# Altium PCB Test.PcbDoc (part 1 of 4)
Units mm, origin at the board's own origin, x right, y up, seen from the top; angles counter-clockwise.
Board outline 152.4 x 101.6 mm, 4 copper layers (Top Layer 1, Top Layer, Bottom Layer, Bottom Layer 1), stack 0.603 mm thick; 308 components, 154 nets, 859 pads, 6474 vias.
Unrouted connection lines stored in the file: 683.
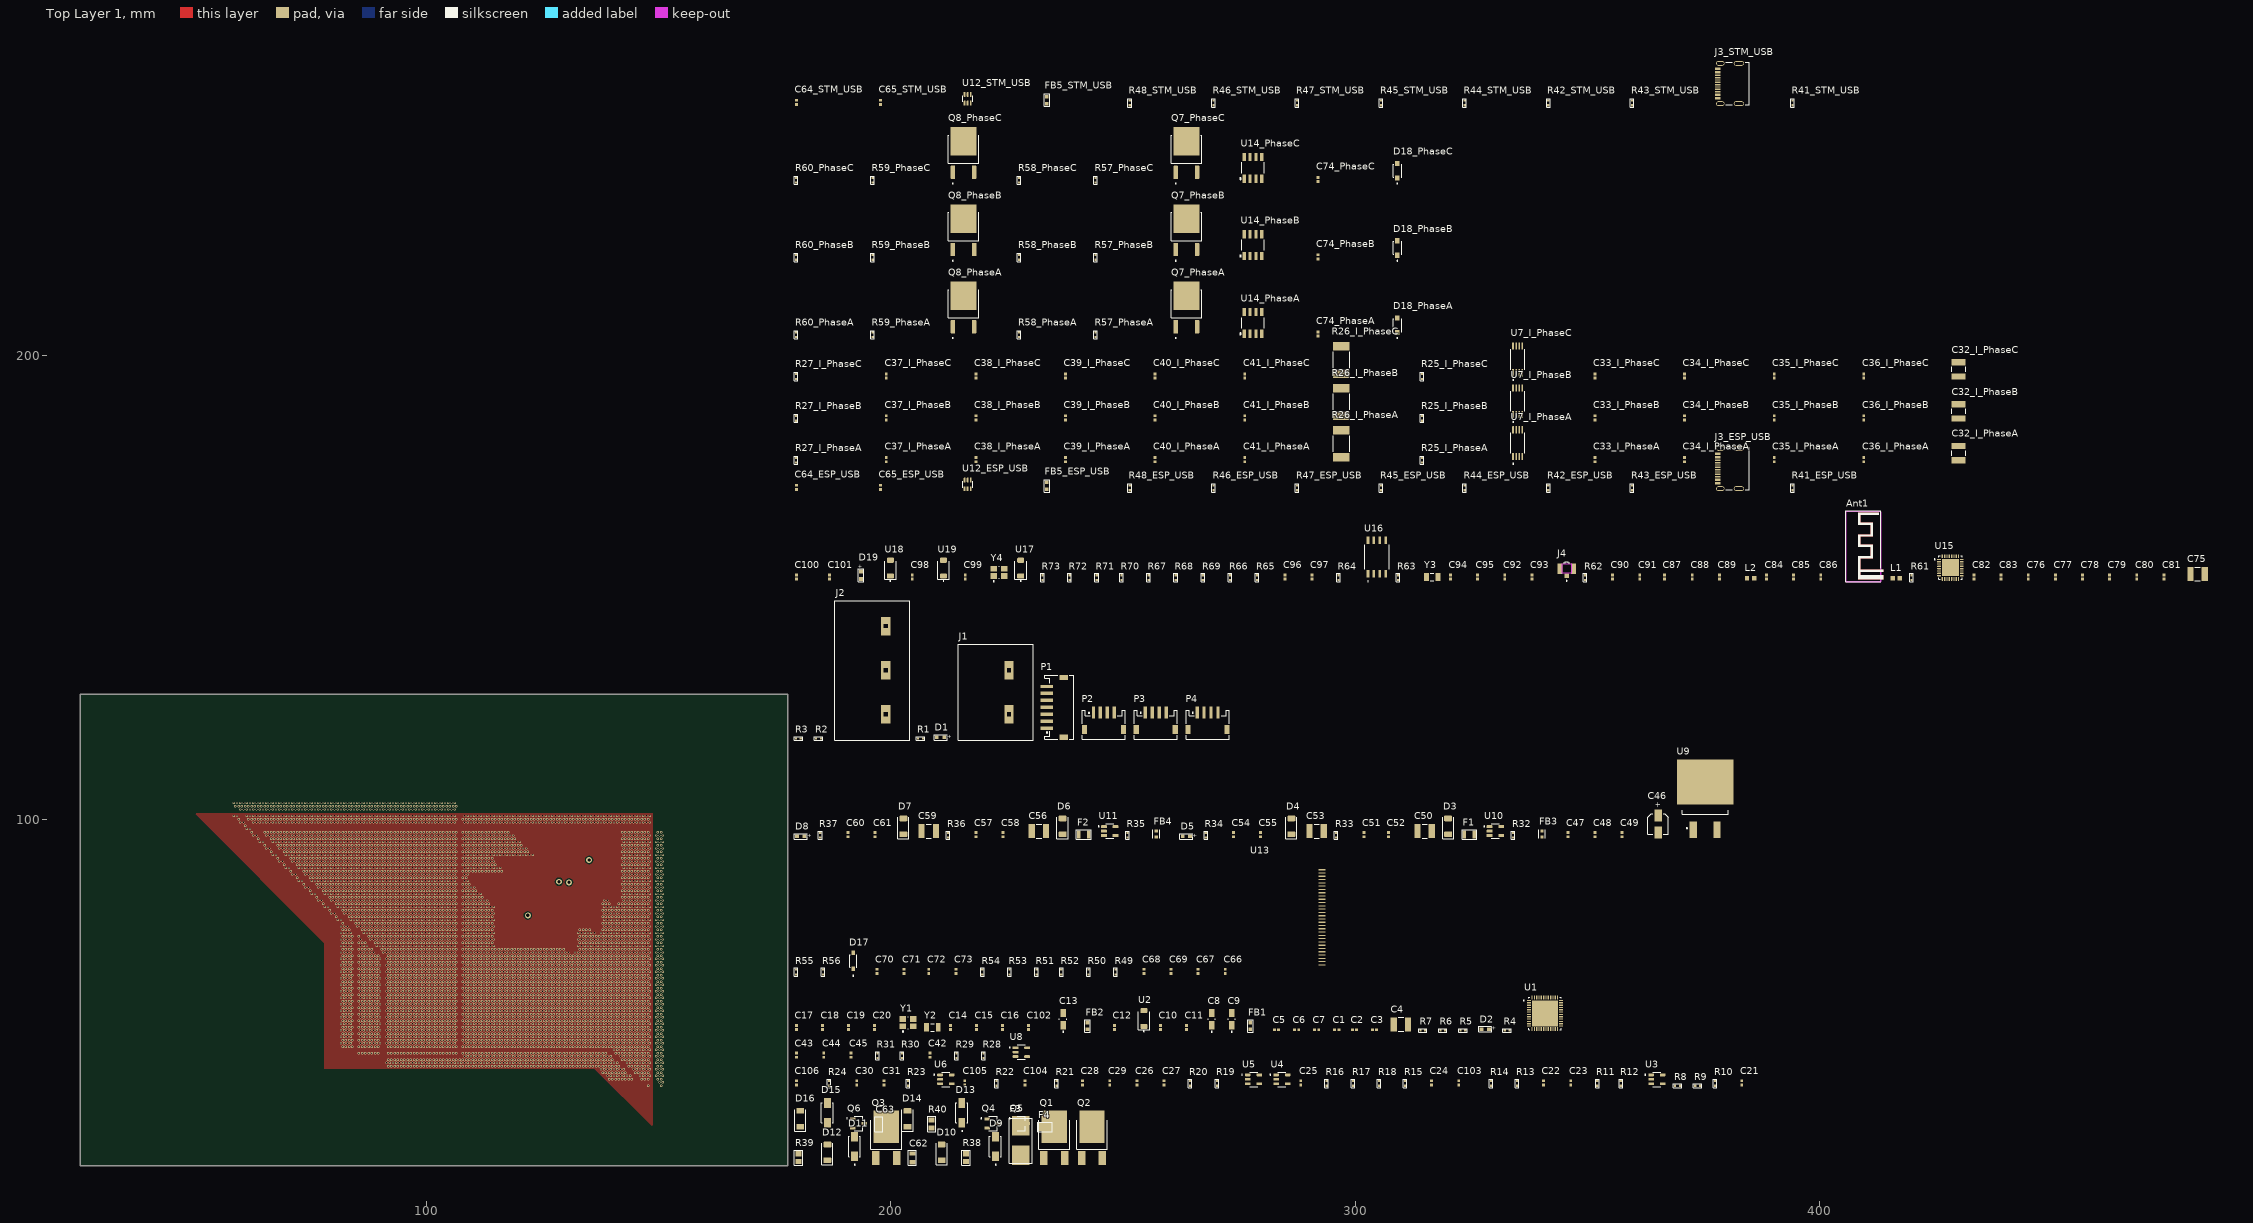
[diagram p0: Top Layer 1 view]
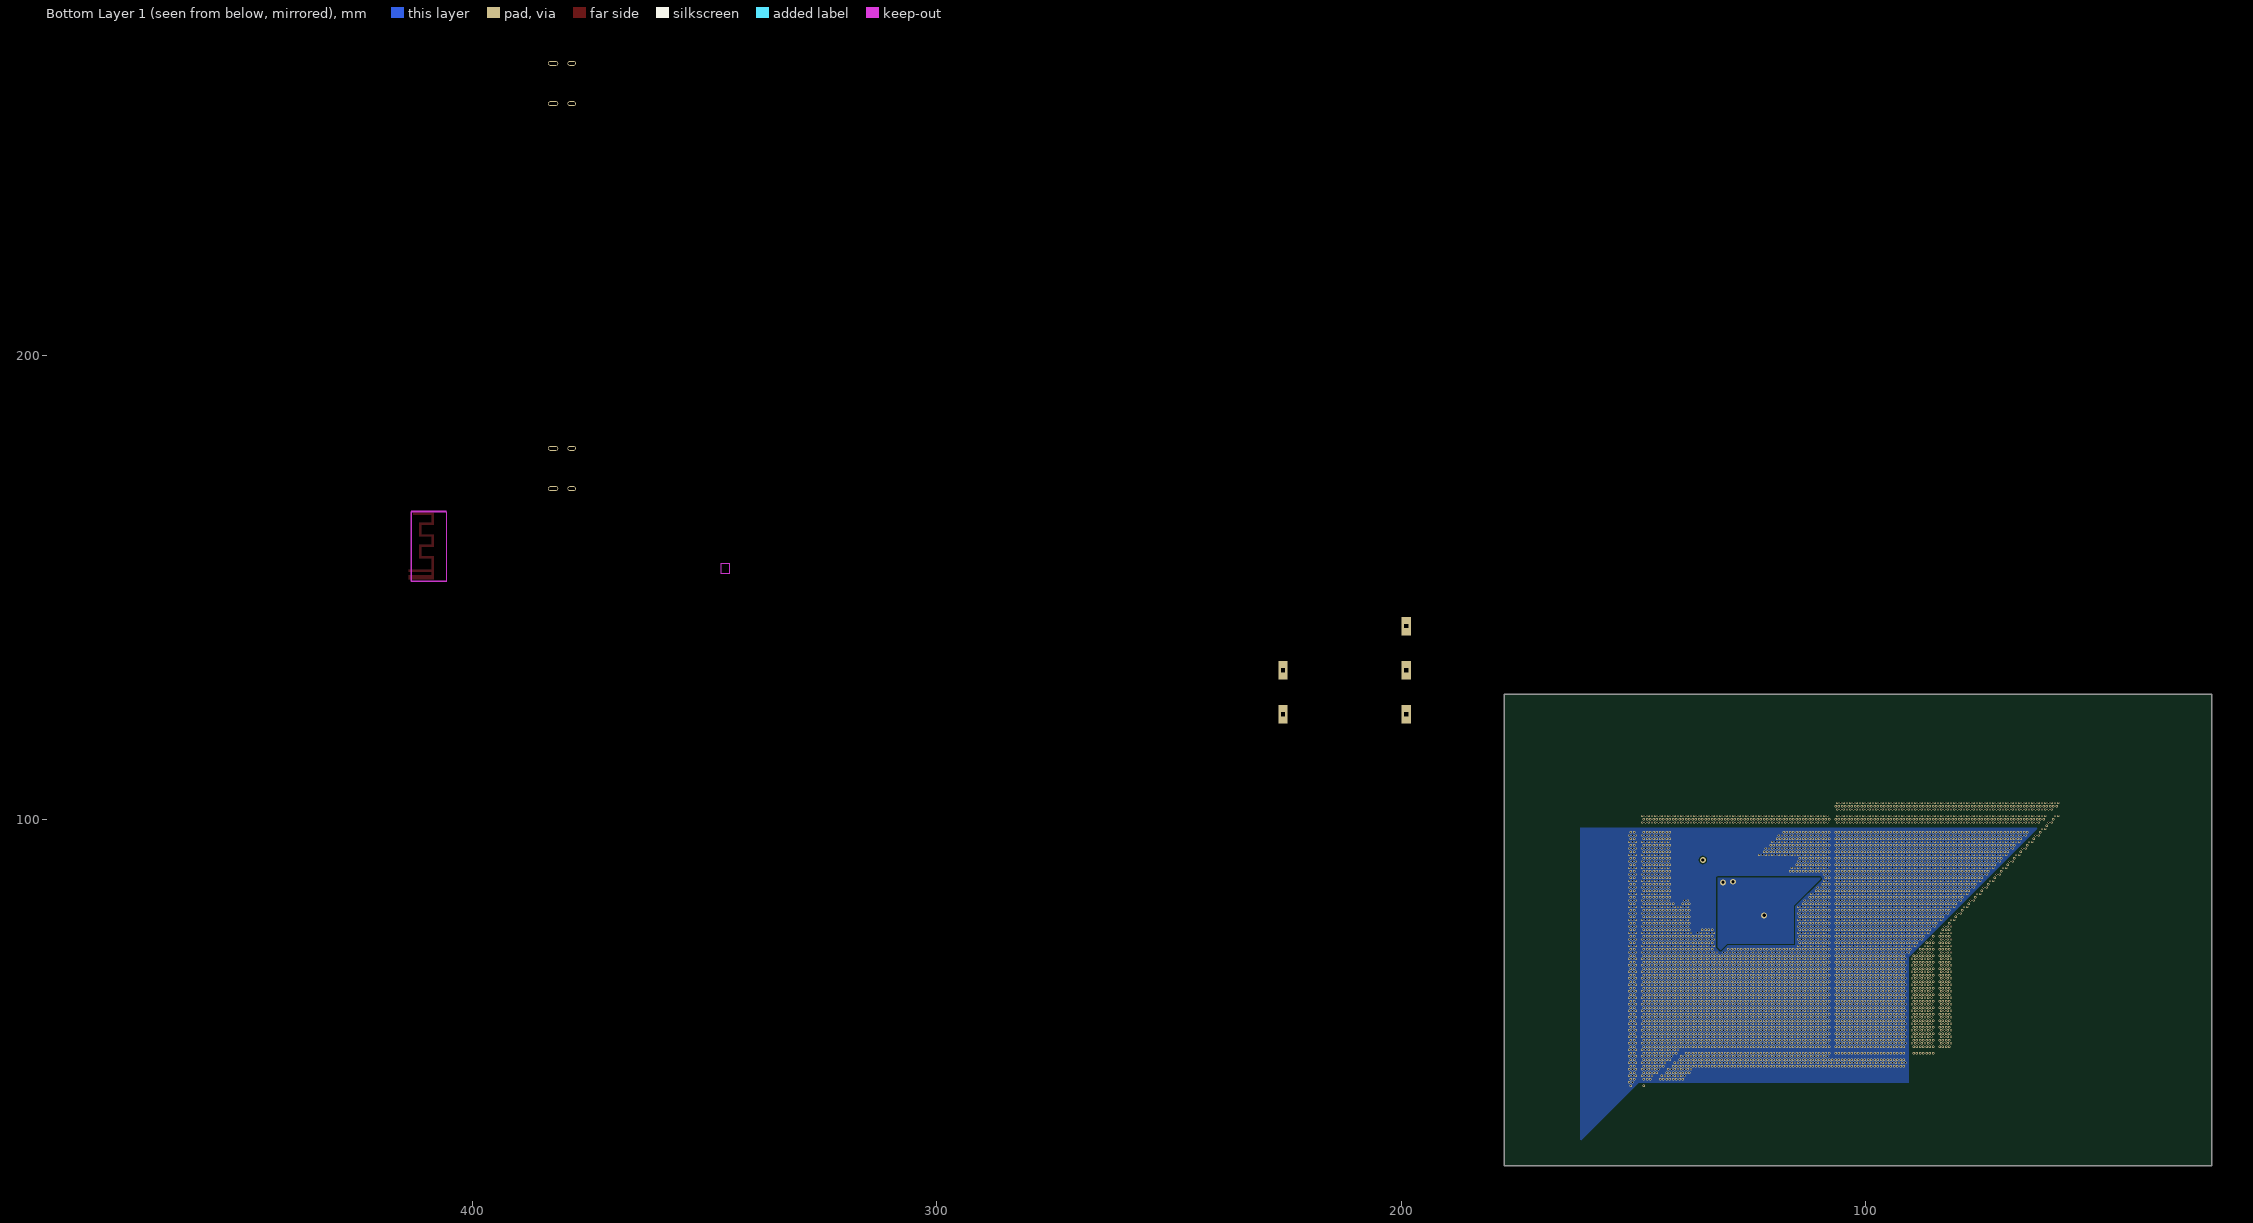
[diagram p1: Bottom Layer 1 view, seen from below]
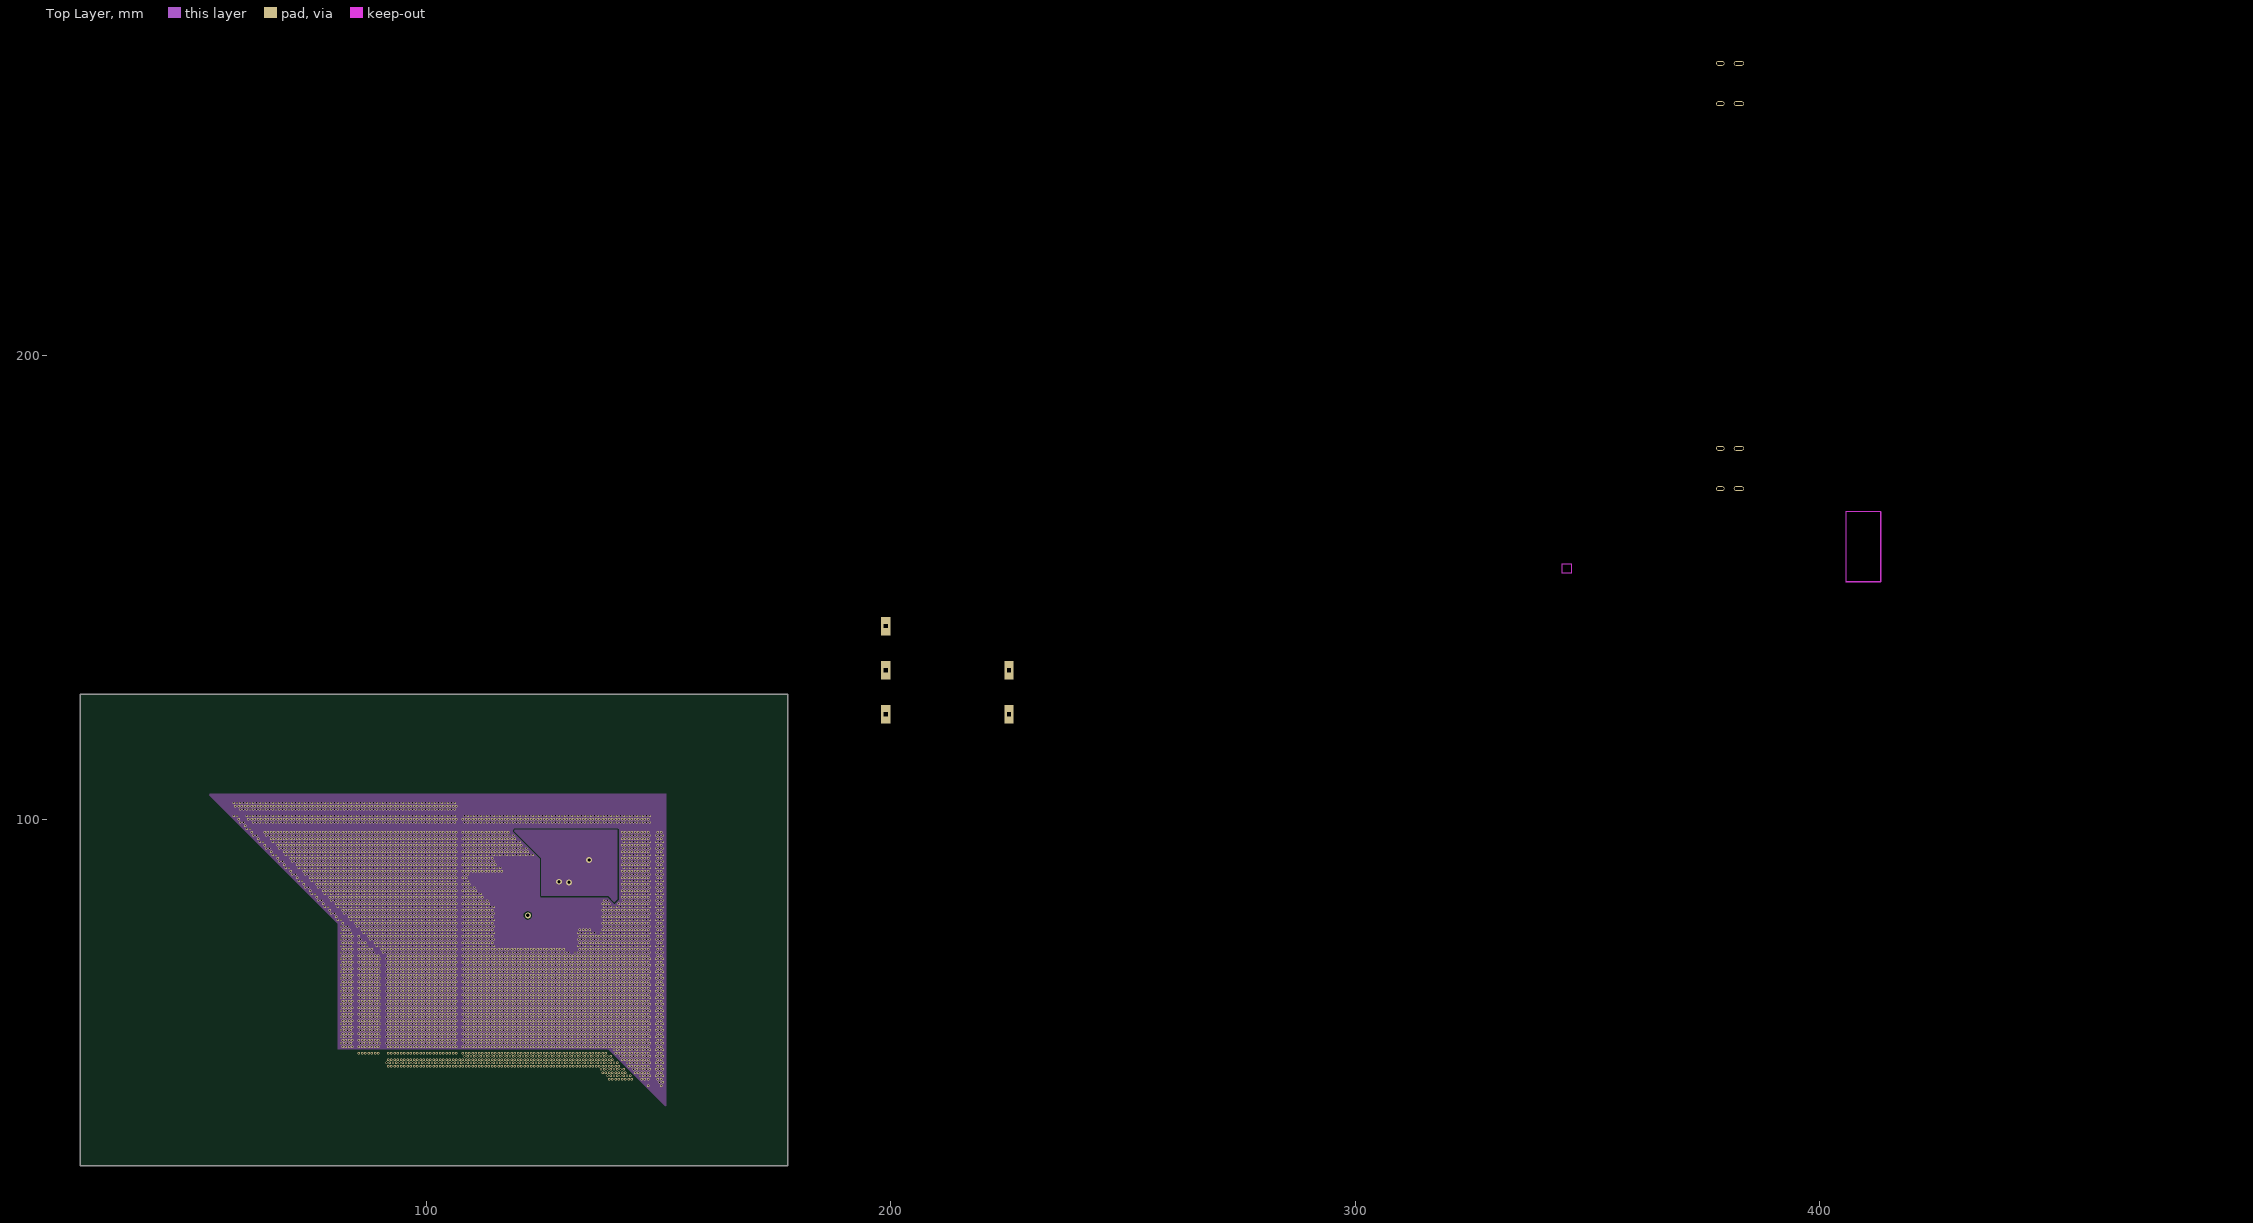
[diagram p2: Top Layer]
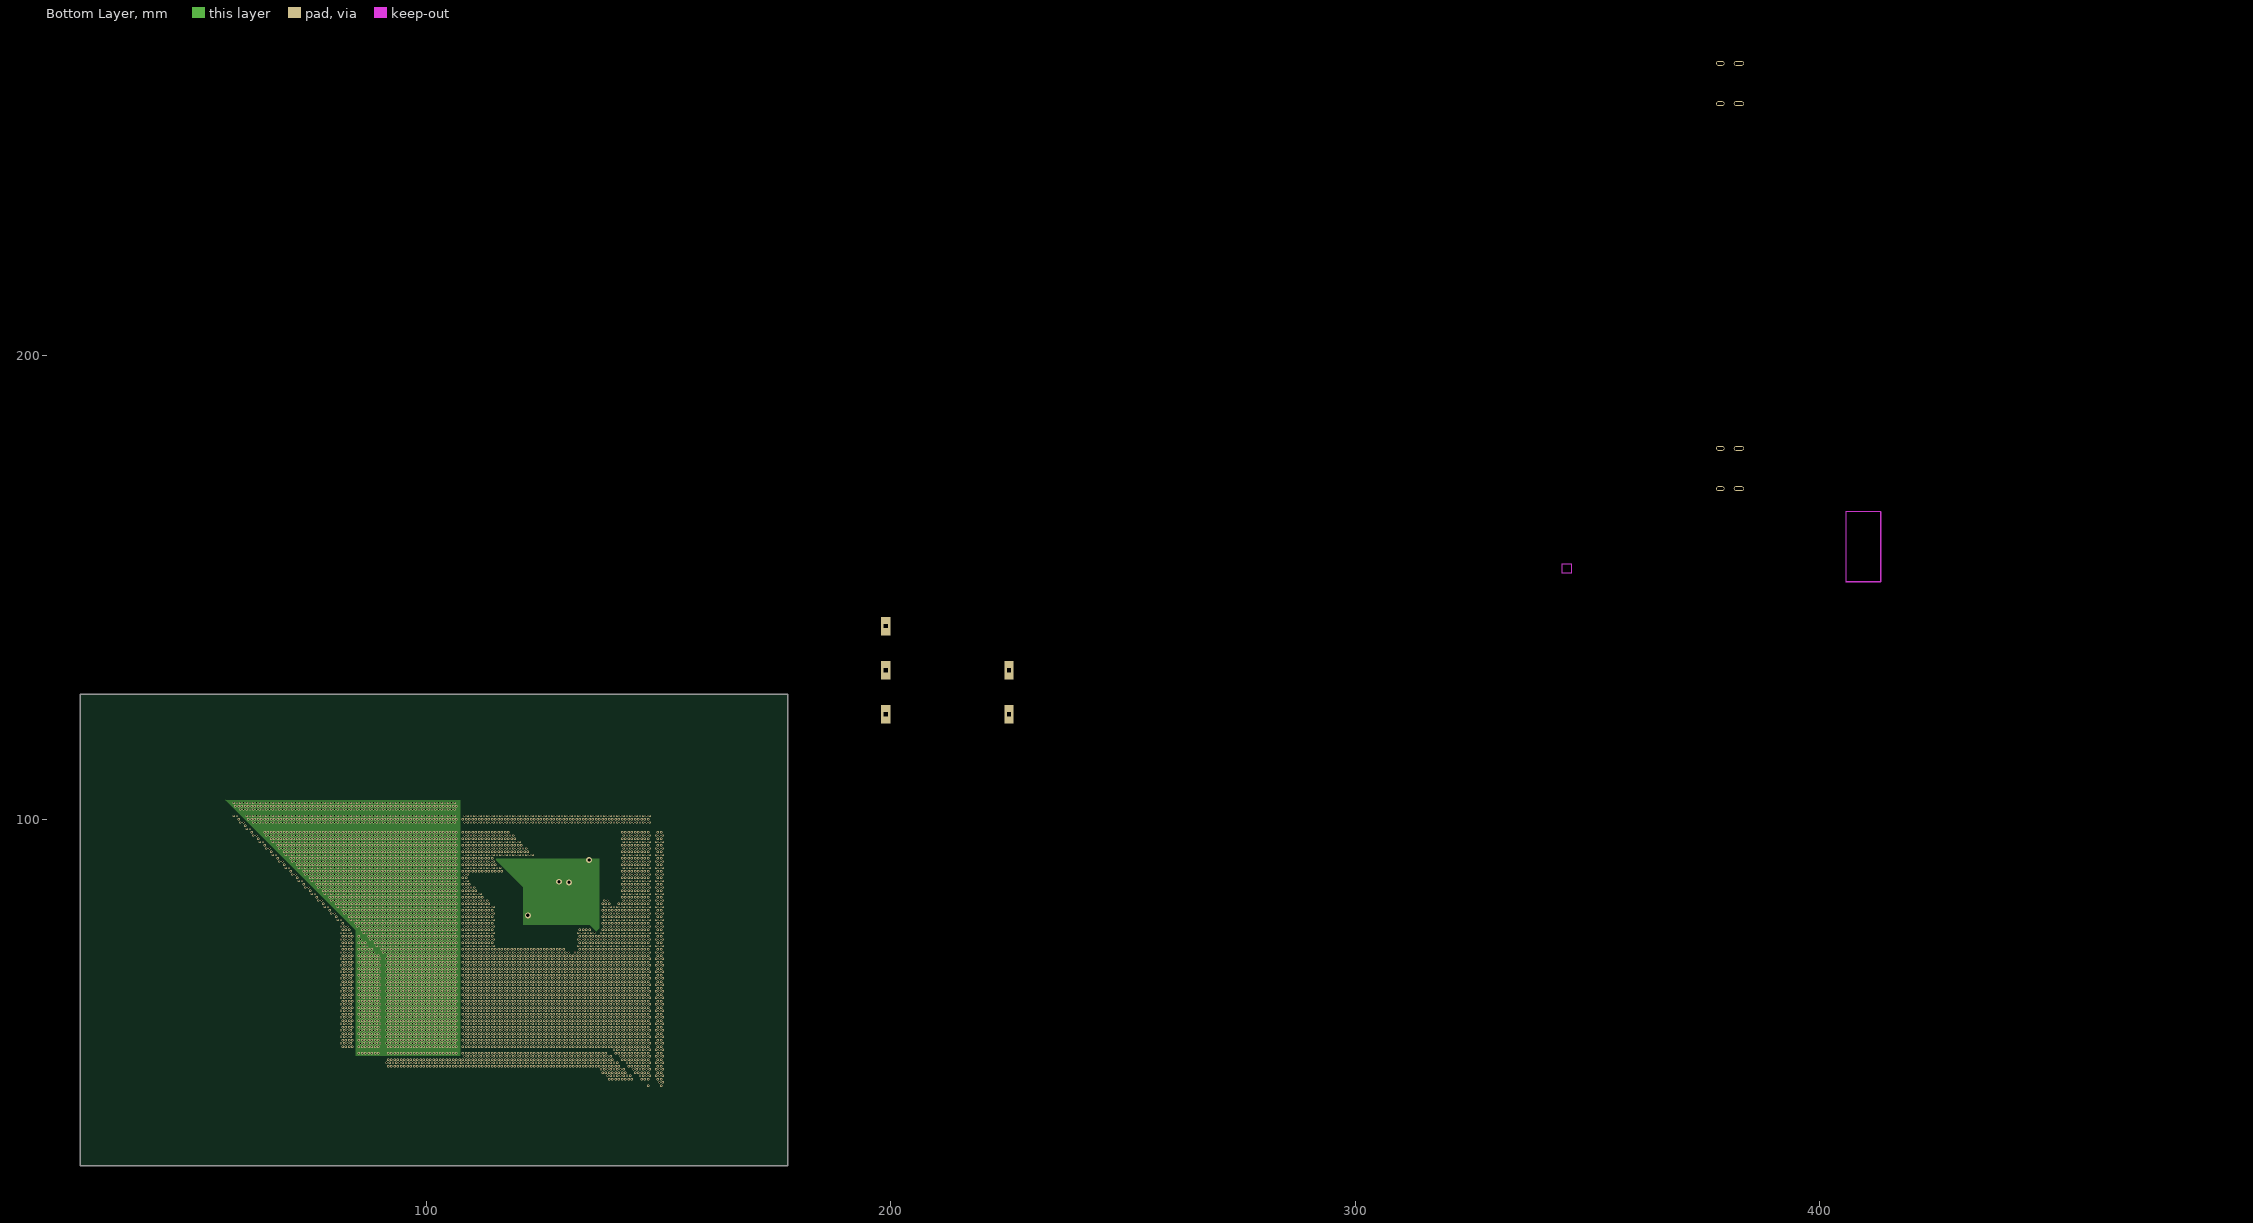
[diagram p3: Bottom Layer]

## Layer stack, top to bottom
Top Solder: solder mask 0.0102, Solder Resist, Dk 3.5
Top Layer 1: signal copper 0.035
Dielectric 2: prepreg 0.0711, PP-006, Dk 4.1
Top Layer: signal copper 0.0356
Dielectric 1: dielectric 0.32, FR-4, Dk 4.8
Bottom Layer: signal copper 0.0356
Dielectric 3: prepreg 0.0711, PP-006, Dk 4.1
Bottom Layer 1: signal copper 0.035
Bottom Solder: solder mask 0.0102, Solder Resist, Dk 3.5

## Board outline
25.4,25.4 177.8,25.4 177.8,127 25.4,127

## Design rules (kind name [scope] priority, off if disabled: settings)
Clearance [All] p1: gap=0.254 ignorepadtopadclearanceinfootprint=FALSE
DiffPairsRouting [All] p1: maxlimit=0.254 minlimit=0.254 mostfreqgap=0.254 toplayer_minwidth=0.381 toplayer_maxwidth=0.381 toplayer_prefwidth=0.381 midlayer1_minwidth=0.381 midlayer1_maxwidth=0.381 midlayer1_prefwidth=0.381 midlayer2_minwidth=0.381 midlayer2_maxwidth=0.381 midlayer2_prefwidth=0.381 bottomlayer_minwidth=0.381 bottomlayer_maxwidth=0.381 bottomlayer_prefwidth=0.381 maxuncoupledlength=12.7
MatchedLengths "Schematic Matched Net Lengths_1" [InDifferentialPairClass('USB_Out')] p1: tolerance=25.4 checknetsindiffpair=FALSE checkdiffpairvsdiffpair=TRUE checkxsignals=TRUE checkothers=TRUE usedelayunits=TRUE delaytolerance=5.000000
MatchedLengths "Schematic Matched Net Lengths" [InDifferentialPairClass('USB_In')] p2: tolerance=25.4 checknetsindiffpair=FALSE checkdiffpairvsdiffpair=TRUE checkxsignals=TRUE checkothers=TRUE usedelayunits=TRUE delaytolerance=5.000000
PolygonConnect [All] p1: connectstyle=Direct reliefconductorwidth=0.254 reliefentries=4 polygonreliefangle="90 Angle" airgapwidth=0.254
RoutingVias [All] p1: holewidth=0.711 width=1.27 viastyle="Through Hole" minholewidth=0.711 minwidth=1.27 maxholewidth=0.711 maxwidth=1.27
SolderMaskExpansion [All] p1: expansion=0.102 istentingtop=FALSE
SupplyNets "Schematic Supply Nets_9" [InNet('5Vout')] p1: voltage=0.000
SupplyNets "Schematic Supply Nets_8" [InNet('GND')] p2: voltage=0.000
SupplyNets "Schematic Supply Nets_7" [InNet('USB5V')] p3: voltage=0.000
SupplyNets "Schematic Supply Nets_6" [InNet('3V3_1')] p4: voltage=0.000
SupplyNets "Schematic Supply Nets_5" [InNet('Wifi_SPI_3V3')] p5: voltage=0.000
SupplyNets "Schematic Supply Nets_4" [InNet('MCU3V3')] p6: voltage=0.000
SupplyNets "Schematic Supply Nets_3" [InNet('3V3_2')] p7: voltage=0.000
SupplyNets "Schematic Supply Nets_2" [InNet('BatVoltage')] p8: voltage=0.000
SupplyNets "Schematic Supply Nets_1" [InNet('5Vin')] p9: voltage=0.000
SupplyNets "Schematic Supply Nets" [InNet('VHin')] p10: voltage=0.000
Width "Schematic Width Constraint_2" [InNet('NetD10_K')] p1: maxlimit=2.54 minlimit=1.27 preferedwidth=1.27
Width "Schematic Width Constraint_1" [InNet('NetD14_K')] p2: maxlimit=2.54 minlimit=1.27 preferedwidth=1.27
Width "Schematic Width Constraint" [InNetClass('Motor Power')] p3: maxlimit=2.54 minlimit=0.762 preferedwidth=0.762
Width [All] p4: maxlimit=0.254 minlimit=0.254 preferedwidth=0.254
29 further rules are at their usual default settings.

## Classes and differential pairs
differential pair class USB_Out: DR_ESP_USB DR_STM_USB
differential pair class USB_In: D_ESP_USB D_STM_USB
channel class USB: ESP_USB STM_USB
channel class GateDriver: PhaseA PhaseB PhaseC
channel class CurrentSense: I_PhaseA I_PhaseB I_PhaseC
net class "Motor Power": BatVoltage NetQ8_PhaseA_3 NetQ8_PhaseB_3 NetQ8_PhaseC_3 PhaseA PhaseB PhaseC
component class U_Wifi: Ant1 C75 C76 C77 C78 C79 C80 C81 C82 C83 C84 C85 C86 C87 C88 C89 C90 C91 C92 C93 C94 C95 C96 C97 C98 C99 C100 C101 D19 J4 L1 L2 R61 R62 R63 R64 R65 R66 R67 R68 R69 R70 R71 R72 R73 U15 U16 U17 U18 U19 Y3 Y4
component class U_TopLevelDesign: D1 J1 J2 P1 P2 P3 P4 R1 R2 R3
component class U_Power: C46 C47 C48 C49 C50 C51 C52 C53 C54 C55 C56 C57 C58 C59 C60 C61 D3 D4 D5 D6 D7 D8 F1 F2 FB3 FB4 R32 R33 R34 R35 R36 R37 U9 U10 U11
component class U_OLED: C66 C67 C68 C69 C70 C71 C72 C73 D17 R49 R50 R51 R52 R53 R54 R55 R56 U13
component class U_MCU: C1 C2 C3 C4 C5 C6 C7 C8 C9 C10 C11 C12 C13 C14 C15 C16 C17 C18 C19 C20 C102 D2 FB1 FB2 R4 R5 R6 R7 U1 U2 Y1 Y2
component class U_BattVoltSense: C42 C43 C44 C45 R28 R29 R30 R31 U8
component class U_BackEMF: C21 C22 C23 C24 C25 C26 C27 C28 C29 C30 C31 C103 C104 C105 C106 R8 R9 R10 R11 R12 R13 R14 R15 R16 R17 R18 R19 R20 R21 R22 R23 R24 U3 U4 U5 U6
component class U_5VProtect: C63 D13 D14 D15 D16 F4 Q4 Q5 Q6 R40
component class STM_USB: C64_STM_USB C65_STM_USB FB5_STM_USB J3_STM_USB R41_STM_USB R42_STM_USB R43_STM_USB R44_STM_USB R45_STM_USB R46_STM_USB R47_STM_USB R48_STM_USB U12_STM_USB
component class PhaseC: C74_PhaseC D18_PhaseC Q7_PhaseC Q8_PhaseC R57_PhaseC R58_PhaseC R59_PhaseC R60_PhaseC U14_PhaseC
component class PhaseB: C74_PhaseB D18_PhaseB Q7_PhaseB Q8_PhaseB R57_PhaseB R58_PhaseB R59_PhaseB R60_PhaseB U14_PhaseB
component class PhaseA: C74_PhaseA D18_PhaseA Q7_PhaseA Q8_PhaseA R57_PhaseA R58_PhaseA R59_PhaseA R60_PhaseA U14_PhaseA
component class I_PhaseC: C32_I_PhaseC C33_I_PhaseC C34_I_PhaseC C35_I_PhaseC C36_I_PhaseC C37_I_PhaseC C38_I_PhaseC C39_I_PhaseC C40_I_PhaseC C41_I_PhaseC R25_I_PhaseC R26_I_PhaseC R27_I_PhaseC U7_I_PhaseC
component class I_PhaseB: C32_I_PhaseB C33_I_PhaseB C34_I_PhaseB C35_I_PhaseB C36_I_PhaseB C37_I_PhaseB C38_I_PhaseB C39_I_PhaseB C40_I_PhaseB C41_I_PhaseB R25_I_PhaseB R26_I_PhaseB R27_I_PhaseB U7_I_PhaseB
component class I_PhaseA: C32_I_PhaseA C33_I_PhaseA C34_I_PhaseA C35_I_PhaseA C36_I_PhaseA C37_I_PhaseA C38_I_PhaseA C39_I_PhaseA C40_I_PhaseA C41_I_PhaseA R25_I_PhaseA R26_I_PhaseA R27_I_PhaseA U7_I_PhaseA
component class HighPowerProtect: C62 D9 D10 D11 D12 F3 Q1 Q2 Q3 R38 R39
component class ESP_USB: C64_ESP_USB C65_ESP_USB FB5_ESP_USB J3_ESP_USB R41_ESP_USB R42_ESP_USB R43_ESP_USB R44_ESP_USB R45_ESP_USB R46_ESP_USB R47_ESP_USB R48_ESP_USB U12_ESP_USB
differential pair DR_STM_USB: +DR_STM_USB_P -DR_STM_USB_N
differential pair DR_ESP_USB: +DR_ESP_USB_P -DR_ESP_USB_N
differential pair D_STM_USB: +D_STM_USB_P -D_STM_USB_N
differential pair D_ESP_USB: +D_ESP_USB_P -D_ESP_USB_N

## Components (designator, comment, footprint, x,y, rotation, side; value= is the part's Value field where it differs from the comment)
Ant1 "IFA-2.4Ghz" 2.4Ghz-IFA 413.766,152.654 r90 top
C1 "0402-100nF" CAPC0402(1005)60_N 296.037,54.737 r0 top value=100nF
C2 "0402-100nF" CAPC0402(1005)60_N 299.847,54.737 r0 top value=100nF
C3 "0402-4.7uF" CAPC0402(1005)60_N 304.165,54.737 r0 top value=4.7µF
C4 "T1411-470uF" CAPPC3528X210N 309.88,55.88 r0 top value=470µF
C5 "0402-100nF" CAPC0402(1005)60_N 283.083,54.737 r0 top value=100nF
C6 "0402-100nF" CAPC0402(1005)60_N 287.401,54.737 r0 top value=100nF
C7 "0402-100nF" CAPC0402(1005)60_N 291.719,54.737 r0 top value=100nF
C8 "T1206-10uF" CAPMP3216X180N 269.113,57.023 r90 top value=10µF
C9 "T1206-10uF" CAPMP3216X180N 273.431,57.023 r90 top value=10µF
C10 "0402-100nF" CAPC0402(1005)60_N 258.064,55.245 r90 top value=100nF
C11 "0402-100nF" CAPC0402(1005)60_N 263.652,55.245 r90 top value=100nF
C12 "0402-100nF" CAPC0402(1005)60_N 248.158,55.245 r90 top value=100nF
C13 "T1206-10uF" CAPMP3216X180N 237.109,57.023 r90 top value=10µF
C14 "0402-100nF" CAPC0402(1005)60_N 212.852,55.245 r90 top value=100nF
C15 "0402-100nF" CAPC0402(1005)60_N 218.44,55.245 r90 top value=100nF
C16 "0402-100nF" CAPC0402(1005)60_N 224.028,55.245 r90 top value=100nF
C17 "0402-6pF" CAPC0402(1005)60_N 179.705,55.245 r90 top value=6pF
C18 "0402-6pF" CAPC0402(1005)60_N 185.293,55.245 r90 top value=6pF
C19 "0402-15pF" CAPC0402(1005)60_N 190.881,55.245 r90 top value=15pF
C20 "0402-15pF" CAPC0402(1005)60_N 196.469,55.245 r90 top value=15pF
C21 "0402-1nF" CAPC0402(1005)60_N 383.286,43.307 r90 top value=1nF
C22 "0402-10nF" CAPC0402(1005)60_N 340.614,43.307 r90 top value=10nF
C23 "0402-1nF" CAPC0402(1005)60_N 346.456,43.307 r90 top value=1nF
C24 "0402-1nF" CAPC0402(1005)60_N 316.484,43.307 r90 top value=1nF
C25 "0402-1nF" CAPC0402(1005)60_N 288.29,43.307 r90 top value=1nF
C26 "0402-10nF" CAPC0402(1005)60_N 252.984,43.307 r90 top value=10nF
C27 "0402-1nF" CAPC0402(1005)60_N 258.826,43.307 r90 top value=1nF
C28 "0402-10nF" CAPC0402(1005)60_N 241.3,43.307 r90 top value=10nF
C29 "0402-1nF" CAPC0402(1005)60_N 247.142,43.307 r90 top value=1nF
C30 "0402-10nF" CAPC0402(1005)60_N 192.659,43.307 r90 top value=10nF
C31 "0402-1nF" CAPC0402(1005)60_N 198.501,43.307 r90 top value=1nF
C32_I_PhaseA "T1411-100uF" CAPPC3528X210N 430.022,178.943 r90 top value=100µF (schematic designator C32)
C32_I_PhaseB "T1411-100uF" CAPPC3528X210N 430.022,187.96 r90 top value=100µF (schematic designator C32)
C32_I_PhaseC "T1411-100uF" CAPPC3528X210N 430.022,196.977 r90 top value=100µF (schematic designator C32)
C33_I_PhaseA "0402-10uF" CAPC0402(1005)60_N 351.663,177.546 r90 top value=10µF (schematic designator C33)
C33_I_PhaseB "0402-10uF" CAPC0402(1005)60_N 351.663,186.563 r90 top value=10µF (schematic designator C33)
C33_I_PhaseC "0402-10uF" CAPC0402(1005)60_N 351.663,195.58 r90 top value=10µF (schematic designator C33)
C34_I_PhaseA "0402-10uF" CAPC0402(1005)60_N 370.967,177.546 r90 top value=10µF (schematic designator C34)
C34_I_PhaseB "0402-10uF" CAPC0402(1005)60_N 370.967,186.563 r90 top value=10µF (schematic designator C34)
C34_I_PhaseC "0402-10uF" CAPC0402(1005)60_N 370.967,195.58 r90 top value=10µF (schematic designator C34)
C35_I_PhaseA "0402-10nF" CAPC0402(1005)60_N 390.271,177.546 r90 top value=10nF (schematic designator C35)
C35_I_PhaseB "0402-10nF" CAPC0402(1005)60_N 390.271,186.563 r90 top value=10nF (schematic designator C35)
C35_I_PhaseC "0402-10nF" CAPC0402(1005)60_N 390.271,195.58 r90 top value=10nF (schematic designator C35)
C36_I_PhaseA "0402-10nF" CAPC0402(1005)60_N 409.575,177.546 r90 top value=10nF (schematic designator C36)
C36_I_PhaseB "0402-10nF" CAPC0402(1005)60_N 409.575,186.563 r90 top value=10nF (schematic designator C36)
C36_I_PhaseC "0402-10nF" CAPC0402(1005)60_N 409.575,195.58 r90 top value=10nF (schematic designator C36)
C37_I_PhaseA "0402-1nF" CAPC0402(1005)60_N 199.009,177.546 r90 top value=1nF (schematic designator C37)
C37_I_PhaseB "0402-1nF" CAPC0402(1005)60_N 199.009,186.563 r90 top value=1nF (schematic designator C37)
C37_I_PhaseC "0402-1nF" CAPC0402(1005)60_N 199.009,195.58 r90 top value=1nF (schematic designator C37)
C38_I_PhaseA "0402-10nF" CAPC0402(1005)60_N 218.313,177.546 r90 top value=10nF (schematic designator C38)
C38_I_PhaseB "0402-10nF" CAPC0402(1005)60_N 218.313,186.563 r90 top value=10nF (schematic designator C38)
C38_I_PhaseC "0402-10nF" CAPC0402(1005)60_N 218.313,195.58 r90 top value=10nF (schematic designator C38)
C39_I_PhaseA "0402-10nF" CAPC0402(1005)60_N 237.617,177.546 r90 top value=10nF (schematic designator C39)
C39_I_PhaseB "0402-10nF" CAPC0402(1005)60_N 237.617,186.563 r90 top value=10nF (schematic designator C39)
C39_I_PhaseC "0402-10nF" CAPC0402(1005)60_N 237.617,195.58 r90 top value=10nF (schematic designator C39)
C40_I_PhaseA "0402-10nF" CAPC0402(1005)60_N 256.921,177.546 r90 top value=10nF (schematic designator C40)
C40_I_PhaseB "0402-10nF" CAPC0402(1005)60_N 256.921,186.563 r90 top value=10nF (schematic designator C40)
C40_I_PhaseC "0402-10nF" CAPC0402(1005)60_N 256.921,195.58 r90 top value=10nF (schematic designator C40)
C41_I_PhaseA "0402-10nF" CAPC0402(1005)60_N 276.225,177.546 r90 top value=10nF (schematic designator C41)
C41_I_PhaseB "0402-10nF" CAPC0402(1005)60_N 276.225,186.563 r90 top value=10nF (schematic designator C41)
C41_I_PhaseC "0402-10nF" CAPC0402(1005)60_N 276.225,195.58 r90 top value=10nF (schematic designator C41)
C42 "0402-10uF" CAPC0402(1005)60_N 208.407,49.276 r90 top value=10µF
C43 "0402-10uF" CAPC0402(1005)60_N 179.705,49.276 r90 top value=10µF
C44 "0402-10uF" CAPC0402(1005)60_N 185.547,49.276 r90 top value=10µF
C45 "0402-10uF" CAPC0402(1005)60_N 191.389,49.276 r90 top value=10µF
C46 "865080140002" WCAP-ASLI_D4H5.5 365.252,99.06 r90 top value="47uF, 6.3V"
C47 "0402-1uF" CAPC0402(1005)60_N 345.821,96.774 r90 top value=1µF
C48 "0402-10uF" CAPC0402(1005)60_N 351.663,96.774 r90 top value=10µF
C49 "0402-1uF" CAPC0402(1005)60_N 357.505,96.774 r90 top value=1µF
C50 "T1411-100uF" CAPPC3528X210N 314.96,97.536 r0 top value=100µF
C51 "0402-100nF" CAPC0402(1005)60_N 301.879,96.774 r90 top value=100nF
C52 "0402-100nF" CAPC0402(1005)60_N 307.213,96.774 r90 top value=100nF
C53 "T1411-100uF" CAPPC3528X210N 291.719,97.536 r0 top value=100µF
C54 "0402-1uF" CAPC0402(1005)60_N 273.812,96.774 r90 top value=1µF
C55 "0402-10uF" CAPC0402(1005)60_N 279.654,96.774 r90 top value=10µF
C56 "T1411-100uF" CAPPC3528X210N 231.902,97.536 r0 top value=100µF
C57 "0402-100nF" CAPC0402(1005)60_N 218.313,96.774 r90 top value=100nF
C58 "0402-100nF" CAPC0402(1005)60_N 224.155,96.774 r90 top value=100nF
C59 "T1411-100uF" CAPPC3528X210N 208.153,97.536 r0 top value=100µF
C60 "0402-1uF" CAPC0402(1005)60_N 190.754,96.774 r90 top value=1µF
C61 "0402-10uF" CAPC0402(1005)60_N 196.596,96.774 r90 top value=10µF
C62 "0108051041050" CAP_0805 204.597,27.178 r90 top value=100nF
C63 "0108051041050" CAP_0805 197.358,34.417 r90 top value=100nF
C64_ESP_USB "0402-10uF" CAPC0402(1005)60_N 179.705,171.577 r90 top value=10µF (schematic designator C64)
C64_STM_USB "0402-10uF" CAPC0402(1005)60_N 179.705,254.508 r90 top value=10µF (schematic designator C64)
C65_ESP_USB "0402-100nF" CAPC0402(1005)60_N 197.739,171.577 r90 top value=100nF (schematic designator C65)
C65_STM_USB "0402-100nF" CAPC0402(1005)60_N 197.739,254.508 r90 top value=100nF (schematic designator C65)
C66 "0402-1uF" CAPC0402(1005)60_N 272.034,67.31 r90 top value=1µF
C67 "0402-1uF" CAPC0402(1005)60_N 266.192,67.31 r90 top value=1µF
C68 "0402-4.7uF" CAPC0402(1005)60_N 254.508,67.31 r90 top value=4.7µF
C69 "0402-2.2uF" CAPC0402(1005)60_N 260.35,67.31 r90 top value=2.2µF
C70 "0402-1uF" CAPC0402(1005)60_N 196.977,67.31 r90 top value=1µF
C71 "0402-1uF" CAPC0402(1005)60_N 202.819,67.31 r90 top value=1µF
C72 "0402-1uF" CAPC0402(1005)60_N 208.153,67.31 r90 top value=1µF
C73 "0402-1uF" CAPC0402(1005)60_N 213.995,67.31 r90 top value=1µF
C74_PhaseA "0402-22uF" CAPC0402(1005)60_N 291.973,204.597 r90 top value=22µF (schematic designator C74)
C74_PhaseB "0402-22uF" CAPC0402(1005)60_N 291.973,221.234 r90 top value=22µF (schematic designator C74)
C74_PhaseC "0402-22uF" CAPC0402(1005)60_N 291.973,237.871 r90 top value=22µF (schematic designator C74)
C75 "T1411-470uF" CAPPC3528X210N 481.457,152.908 r0 top value=470µF
C76 "0402-1uF" CAPC0402(1005)60_N 445.008,152.273 r90 top value=1µF
C77 "0402-1uF" CAPC0402(1005)60_N 450.85,152.273 r90 top value=1µF
C78 "0402-1uF" CAPC0402(1005)60_N 456.692,152.273 r90 top value=1µF
C79 "0402-10uF" CAPC0402(1005)60_N 462.534,152.273 r90 top value=10µF
C80 "0402-10uF" CAPC0402(1005)60_N 468.376,152.273 r90 top value=10µF
C81 "0402-10uF" CAPC0402(1005)60_N 474.218,152.273 r90 top value=10µF
C82 "0402-1uF" CAPC0402(1005)60_N 433.324,152.273 r90 top value=1µF
C83 "0402-10nF" CAPC0402(1005)60_N 439.166,152.273 r90 top value=10nF
C84 "0402-1uF" CAPC0402(1005)60_N 388.62,152.273 r90 top value=1µF
C85 "0402-100nF" CAPC0402(1005)60_N 394.462,152.273 r90 top value=100nF
C86 "0402-10uF" CAPC0402(1005)60_N 400.304,152.273 r90 top value=10µF
C87 "0402-100nF" CAPC0402(1005)60_N 366.649,152.273 r90 top value=100nF
C88 "0402-1uF" CAPC0402(1005)60_N 372.618,152.273 r90 top value=1µF
C89 "0402-100nF" CAPC0402(1005)60_N 378.46,152.273 r90 top value=100nF
C90 "0402-1pF" CAPC0402(1005)60_N 355.473,152.273 r90 top value=1pF
C91 "0402-1pF" CAPC0402(1005)60_N 361.315,152.273 r90 top value=1pF
C92 "0402-10nF" CAPC0402(1005)60_N 332.232,152.273 r90 top value=10nF
C93 "0402-10nF" CAPC0402(1005)60_N 338.074,152.273 r90 top value=10nF
C94 "0402-1uF" CAPC0402(1005)60_N 320.548,152.273 r90 top value=1µF
C95 "0402-1uF" CAPC0402(1005)60_N 326.39,152.273 r90 top value=1µF
C96 "0402-15pF" CAPC0402(1005)60_N 284.861,152.273 r90 top value=15pF
C97 "0402-15pF" CAPC0402(1005)60_N 290.703,152.273 r90 top value=15pF
C98 "0402-100nF" CAPC0402(1005)60_N 204.597,152.273 r90 top value=100nF
C99 "0402-100nF" CAPC0402(1005)60_N 216.027,152.273 r90 top value=100nF
C100 "0402-6pF" CAPC0402(1005)60_N 179.705,152.273 r90 top value=6pF
C101 "0402-6pF" CAPC0402(1005)60_N 186.817,152.273 r90 top value=6pF
C102 "0402-10uF" CAPC0402(1005)60_N 229.616,55.245 r90 top value=10µF
C103 "0402-1nF" CAPC0402(1005)60_N 322.326,43.307 r90 top value=1nF
C104 "0402-1nF" CAPC0402(1005)60_N 228.854,43.307 r90 top value=1nF
C105 "0402-1nF" CAPC0402(1005)60_N 215.9,43.307 r90 top value=1nF
C106 "0402-1nF" CAPC0402(1005)60_N 179.705,43.307 r90 top value=1nF
D1 "160603WhiteBlur" WL-SMCW_0603_H=0.7mm 210.693,117.729 r0 top value=White
D2 "160603WhiteBlur" WL-SMCW_0603_H=0.7mm 328.041,54.864 r0 top value=White
D3 "ZMM5.1" SOD-80_MiniMELF_Glass 320.04,98.552 r90 top value=5.1V
D4 "ZMM3.6" SOD-80_MiniMELF_Glass 286.258,98.552 r90 top value=3.6V
D5 "160603RedBlur" WL-SMCW_0603_H=0.7mm 263.652,96.393 r0 top value="Red, 2V"
D6 "ZMM5.1" SOD-80_MiniMELF_Glass 236.982,98.552 r90 top value=5.1V
D7 "ZMM3.6" SOD-80_MiniMELF_Glass 202.692,98.552 r90 top value=3.6V
D8 "160603RedBlur" WL-SMCW_0603_H=0.7mm 180.594,96.393 r0 top value="Red, 2V"
D9 "SMAJ18A" DIOM4325X250N 222.504,29.591 r90 top
D10 "ZMM18" SOD-80_MiniMELF_Glass 210.947,28.321 r90 top value=Shottky-Diode
D11 "SMAJ18A" DIOM4325X250N 192.151,29.591 r90 top
D12 "ZMM18" SOD-80_MiniMELF_Glass 186.309,28.321 r90 top value=Shottky-Diode
D13 "SMAJ18A" DIOM4325X250N 215.265,36.83 r90 top
D14 "ZMM18" SOD-80_MiniMELF_Glass 203.581,35.56 r90 top value=Shottky-Diode
D15 "SMAJ18A" DIOM4325X250N 186.309,36.83 r90 top
D16 "ZMM18" SOD-80_MiniMELF_Glass 180.467,35.56 r90 top value=Shottky-Diode
D17 "1N4148W" SODFL3816X120N 191.897,69.596 r90 top
D18_PhaseA "1N5819W" 1N5819W 309.118,206.502 r90 top (schematic designator D18)
D18_PhaseB "1N5819W" 1N5819W 309.118,223.139 r90 top (schematic designator D18)
D18_PhaseC "1N5819W" 1N5819W 309.118,239.776 r90 top (schematic designator D18)
D19 "160603WhiteBlur" WL-SMCW_0603_H=0.7mm 193.548,152.654 r90 top value=White
F1 "0805,0.5A" Fuse_SMD_0805 324.612,96.774 r0 top value="6V,  0.5A"
F2 "0805,0.5A" Fuse_SMD_0805 241.554,96.774 r0 top value="6V,  0.5A"
F3 "1808Fuse" 0154007.DR 227.965,30.861 r90 top
F4 "060805100006" Fuse_SMD_0805 233.172,33.782 r0 top value="6V,  1A"
FB1 "03060360110225" FER_0603 277.495,55.626 r90 top
FB2 "03060360110225" FER_0603 242.443,55.626 r90 top
FB3 "BLM18PG121SN1D" FP-BLM18-0_15-t0_8-MFG 340.233,96.901 r90 top
FB4 "BLM18PG121SN1D" FP-BLM18-0_15-t0_8-MFG 257.175,96.901 r90 top
FB5_ESP_USB "03060360110225" FER_0603 233.68,171.958 r90 top (schematic designator FB5)
FB5_STM_USB "03060360110225" FER_0603 233.68,255.016 r90 top (schematic designator FB5)
J1 "HB9500-2" HB9500-2 225.425,122.682 r90 top
J2 "HB9500-3" HB9500-3 198.882,122.682 r90 top
J3_ESP_USB "TypeC-16P" MOLEX_2171790001 381.508,175.641 r90 top (schematic designator J3)
J3_STM_USB "TypeC-16P" MOLEX_2171790001 381.508,258.572 r90 top (schematic designator J3)
J4 "20279-001E-03" IPEX_20279-001E-03 345.567,154.051 r0 top
L1 "0603-2nH" INDC1608X80N 416.56,152.019 r0 top value=2nH
L2 "0603-2nH" INDC1608X80N 385.191,152.019 r0 top value=2nH
P1 "648107131822" 648107131822 236.22,124.206 r90 top value="1A, 50 V (AC)"
P2 "648104131822" 648104131822 245.872,120.396 r0 top value="1A, 50 V (AC)"
P3 "648104131822" 648104131822 257.048,120.396 r0 top value="1A, 50 V (AC)"
P4 "648104131822" 648104131822 268.224,120.396 r0 top value="1A, 50 V (AC)"
Q1 "AOD4185" DPAK 235.204,32.004 r0 top
Q2 "AOD4185" DPAK 243.332,32.004 r0 top
Q3 "AOD4185" DPAK 199.009,32.004 r0 top
Q4 "AO3407A" SOT95P280X125-3N 221.996,34.544 r0 top
Q5 "AO3407A" SOT95P280X125-3N 228.092,34.544 r0 top
Q6 "AO3407A" SOT95P280X125-3N 193.04,34.544 r0 top
Q7_PhaseA "IRLR7843TRPBF" TO229P990X239-3_4N 263.652,210.312 r90 top (schematic designator Q7)
Q7_PhaseB "IRLR7843TRPBF" TO229P990X239-3_4N 263.652,226.949 r90 top (schematic designator Q7)
Q7_PhaseC "IRLR7843TRPBF" TO229P990X239-3_4N 263.652,243.586 r90 top (schematic designator Q7)
Q8_PhaseA "IRLR7843TRPBF" TO229P990X239-3_4N 215.646,210.312 r90 top (schematic designator Q8)
Q8_PhaseB "IRLR7843TRPBF" TO229P990X239-3_4N 215.646,226.949 r90 top (schematic designator Q8)
Q8_PhaseC "IRLR7843TRPBF" TO229P990X239-3_4N 215.646,243.586 r90 top (schematic designator Q8)
R1 "0402-3.3K" R-0402-10K 206.375,117.475 r0 top value=3.3k
R2 "0402-0" R-0402-1K 184.404,117.475 r0 top value=0
R3 "0402-0" R-0402-1K 180.086,117.475 r0 top value=0
R4 "0402-3.3K" R-0402-10K 332.74,54.61 r0 top value=3.3k
R5 "0402-0" R-0402-1K 323.215,54.61 r0 top value=0
R6 "0402-10K" R-0402-10K 318.897,54.61 r0 top value=10k
R7 "0402-10K" R-0402-10K 314.579,54.61 r0 top value=10k
R8 "0402-47K" R-0402-10K 369.443,42.672 r0 top value=47k
R9 "0402-47K" R-0402-10K 373.761,42.672 r0 top value=47k
R10 "0402-47K" R-0402-10K 377.571,43.18 r90 top value=47k
R11 "0402-47K" R-0402-10K 352.171,43.18 r90 top value=47k
R12 "0402-680" R-0402-1K 357.251,43.18 r90 top value=680
R13 "0402-47K" R-0402-10K 334.899,43.18 r90 top value=47k
R14 "0402-10K" R-0402-10K 329.311,43.18 r90 top value=10k
R15 "0402-47K" R-0402-10K 310.769,43.18 r90 top value=47k
R16 "0402-10K" R-0402-10K 293.878,43.18 r90 top value=10k
R17 "0402-10K" R-0402-10K 299.593,43.18 r90 top value=10k
R18 "0402-10K" R-0402-10K 305.181,43.18 r90 top value=10k
R19 "0402-680" R-0402-1K 270.256,43.18 r90 top value=680
R20 "0402-680" R-0402-1K 264.414,43.18 r90 top value=680
R21 "0402-10K" R-0402-10K 235.712,43.18 r90 top value=10k
R22 "0402-10K" R-0402-10K 222.758,43.18 r90 top value=10k
R23 "0402-680" R-0402-1K 203.708,43.18 r90 top value=680
R24 "0402-10K" R-0402-10K 186.69,43.18 r90 top value=10k
R25_I_PhaseA "0402-1" R-0402-1K 314.452,177.419 r90 top value=1 (schematic designator R25)
R25_I_PhaseB "0402-1" R-0402-1K 314.452,186.436 r90 top value=1 (schematic designator R25)
R25_I_PhaseC "0402-1" R-0402-1K 314.452,195.453 r90 top value=1 (schematic designator R25)
R26_I_PhaseA "2512-0.01" FP-WSLP2512R0100FEA-IPC_A 297.053,180.975 r90 top value=10m (schematic designator R26)
R26_I_PhaseB "2512-0.01" FP-WSLP2512R0100FEA-IPC_A 297.053,189.992 r90 top value=10m (schematic designator R26)
R26_I_PhaseC "2512-0.01" FP-WSLP2512R0100FEA-IPC_A 297.053,199.009 r90 top value=10m (schematic designator R26)
R27_I_PhaseA "0402-10K" R-0402-10K 179.578,177.419 r90 top value=10k (schematic designator R27)
R27_I_PhaseB "0402-10K" R-0402-10K 179.578,186.436 r90 top value=10k (schematic designator R27)
R27_I_PhaseC "0402-10K" R-0402-10K 179.578,195.453 r90 top value=10k (schematic designator R27)
R28 "0402-10K" R-0402-10K 219.964,49.149 r90 top value=10k
R29 "0402-22" R-0402-1K 214.122,49.149 r90 top value=22
R30 "0402-10K" R-0402-10K 202.438,49.149 r90 top value=10k
R31 "0402-1K" R-0402-1K 197.104,49.149 r90 top value=1k
R32 "0402-0" R-0402-1K 334.01,96.647 r90 top value=0
R33 "0402-3.3K" R-0402-10K 295.91,96.647 r90 top value=3.3k
R34 "0402-100K" R-0402-10K 267.843,96.647 r90 top value=100k
R35 "0402-0" R-0402-1K 250.952,96.647 r90 top value=0
R36 "0402-3.3K" R-0402-10K 212.344,96.647 r90 top value=3.3k
R37 "0402-100K" R-0402-10K 184.785,96.647 r90 top value=100k
R38 "0008051031" RESISTOR_0805 216.154,27.178 r90 top value="10 KOhm, 1/8 W"
R39 "0008051031" RESISTOR_0805 180.086,27.178 r90 top value="10 KOhm, 1/8 W"
R40 "0008051031" RESISTOR_0805 208.788,34.417 r90 top value="10 KOhm, 1/8 W"
R41_ESP_USB "0402-10K" R-0402-10K 394.208,171.45 r90 top value=10k (schematic designator R41)
R41_STM_USB "0402-10K" R-0402-10K 394.208,254.381 r90 top value=10k (schematic designator R41)
R42_ESP_USB "0402-10K" R-0402-10K 341.63,171.45 r90 top value=10k (schematic designator R42)
R42_STM_USB "0402-10K" R-0402-10K 341.63,254.381 r90 top value=10k (schematic designator R42)
R43_ESP_USB "0402-10K" R-0402-10K 359.664,171.45 r90 top value=10k (schematic designator R43)
R43_STM_USB "0402-10K" R-0402-10K 359.664,254.381 r90 top value=10k (schematic designator R43)
R44_ESP_USB "0402-22" R-0402-1K 323.596,171.45 r90 top value=22 (schematic designator R44)
R44_STM_USB "0402-22" R-0402-1K 323.596,254.381 r90 top value=22 (schematic designator R44)
R45_ESP_USB "0402-22" R-0402-1K 305.562,171.45 r90 top value=22 (schematic designator R45)
R45_STM_USB "0402-22" R-0402-1K 305.562,254.381 r90 top value=22 (schematic designator R45)
R46_ESP_USB "0402-10K" R-0402-10K 269.494,171.45 r90 top value=10k (schematic designator R46)
R46_STM_USB "0402-10K" R-0402-10K 269.494,254.381 r90 top value=10k (schematic designator R46)
R47_ESP_USB "0402-10K" R-0402-10K 287.528,171.45 r90 top value=10k (schematic designator R47)
R47_STM_USB "0402-10K" R-0402-10K 287.528,254.381 r90 top value=10k (schematic designator R47)
R48_ESP_USB "0402-10K" R-0402-10K 251.46,171.45 r90 top value=10k (schematic designator R48)
R48_STM_USB "0402-10K" R-0402-10K 251.46,254.381 r90 top value=10k (schematic designator R48)
R49 "0402-470K" R-0402-10K 248.412,67.183 r90 top value=470k
R50 "0402-10K" R-0402-10K 242.57,67.183 r90 top value=10k
R51 "0402-10K" R-0402-10K 231.394,67.183 r90 top value=10k
R52 "0402-10K" R-0402-10K 236.728,67.183 r90 top value=10k
R53 "0402-4.7K" R-0402-10K 225.552,67.183 r90 top value=4.7k
R54 "0402-10K" R-0402-10K 219.71,67.183 r90 top value=10k
R55 "0402-10K" R-0402-10K 179.578,67.183 r90 top value=10k
R56 "0402-10K" R-0402-10K 185.42,67.183 r90 top value=10k
R57_PhaseA "0402-100" R-0402-1K 244.094,204.47 r90 top value=100 (schematic designator R57)
R57_PhaseB "0402-100" R-0402-1K 244.094,221.107 r90 top value=100 (schematic designator R57)
R57_PhaseC "0402-100" R-0402-1K 244.094,237.744 r90 top value=100 (schematic designator R57)
R58_PhaseA "0402-10K" R-0402-10K 227.584,204.47 r90 top value=10k (schematic designator R58)
R58_PhaseB "0402-10K" R-0402-10K 227.584,221.107 r90 top value=10k (schematic designator R58)
R58_PhaseC "0402-10K" R-0402-10K 227.584,237.744 r90 top value=10k (schematic designator R58)
R59_PhaseA "0402-100" R-0402-1K 196.088,204.47 r90 top value=100 (schematic designator R59)
R59_PhaseB "0402-100" R-0402-1K 196.088,221.107 r90 top value=100 (schematic designator R59)
R59_PhaseC "0402-100" R-0402-1K 196.088,237.744 r90 top value=100 (schematic designator R59)
R60_PhaseA "0402-10K" R-0402-10K 179.578,204.47 r90 top value=10k (schematic designator R60)
R60_PhaseB "0402-10K" R-0402-10K 179.578,221.107 r90 top value=10k (schematic designator R60)
R60_PhaseC "0402-10K" R-0402-10K 179.578,237.744 r90 top value=10k (schematic designator R60)
R61 "0402-3.3K" R-0402-10K 419.862,152.146 r90 top value=3.3k
R62 "0402-0" R-0402-1K 349.504,152.146 r90 top value=0
R63 "0402-0" R-0402-1K 309.245,152.146 r90 top value=0
R64 "0402-0" R-0402-1K 296.418,152.146 r90 top value=0
R65 "0402-0" R-0402-1K 278.892,152.146 r90 top value=0
R66 "0402-0" R-0402-1K 273.05,152.146 r90 top value=0
R67 "0402-10K" R-0402-10K 255.524,152.146 r90 top value=10k
R68 "0402-10K" R-0402-10K 261.366,152.146 r90 top value=10k
R69 "0402-3.3K" R-0402-10K 267.208,152.146 r90 top value=3.3k
R70 "0402-0" R-0402-1K 249.682,152.146 r90 top value=0
R71 "0402-0" R-0402-1K 244.348,152.146 r90 top value=0
R72 "0402-3.3K" R-0402-10K 238.506,152.146 r90 top value=3.3k
R73 "0402-3.3K" R-0402-10K 232.664,152.146 r90 top value=3.3k
U1 "STM32G431CBU6" QFN50P700X700X60-49N 340.868,58.293 r0 top
U2 "B3U-1000P" SODFL4025X160N 254.508,57.15 r90 top
U3 "MCP601T-I/OT" SOT95P280X145-5N 364.998,44.069 r0 top
U4 "MCP601T-I/OT" SOT95P280X145-5N 284.226,44.069 r0 top
U5 "MCP601T-I/OT" SOT95P280X145-5N 278.13,44.069 r0 top
U6 "MCP601T-I/OT" SOT95P280X145-5N 211.836,44.069 r0 top
U7_I_PhaseA "INA240A1PW" SOP65P640X120-8N 335.026,181.102 r90 top (schematic designator U7)
U7_I_PhaseB "INA240A1PW" SOP65P640X120-8N 335.026,190.119 r90 top (schematic designator U7)
U7_I_PhaseC "INA240A1PW" SOP65P640X120-8N 335.026,199.136 r90 top (schematic designator U7)
U8 "MCP601T-I/OT" SOT95P280X145-5N 228.092,49.911 r0 top
U9 "L7805ACD2T_TO-263" TO-263 375.412,104.521 r90 top value="5V, 1.5A"
U10 "RT9013-33GB" SOT94P279X129-5N 330.2,97.536 r0 top
U11 "RT9013-33GB" SOT94P279X129-5N 247.142,97.536 r0 top
U12_ESP_USB "SMF05CT1G" SOT65P210X110-6N 216.535,172.212 r90 top (schematic designator U12)
U12_STM_USB "SMF05CT1G" SOT65P210X110-6N 216.535,255.27 r90 top (schematic designator U12)
U13 "SSD1306_China" SSD1306_China-Footprint-1 292.862,68.707 r90 top
U14_PhaseA "IR2104SPBF" IR2104SPBF 278.003,207.01 r90 top (schematic designator U14)
U14_PhaseB "IR2104SPBF" IR2104SPBF 278.003,223.774 r90 top (schematic designator U14)
U14_PhaseC "IR2104SPBF" IR2104SPBF 278.003,240.411 r90 top (schematic designator U14)
U15 "ESP32-C3FH4" QFN50P500X500X90-33N 428.244,154.305 r0 top
U16 "W25Q128JVSIQ" SOIC127P790X216-8N 304.673,156.591 r90 top
U17 "B3U-1000P" SODFL4025X160N 227.965,154.178 r90 top
U18 "B3U-1000P" SODFL4025X160N 199.898,154.178 r90 top
U19 "B3U-1000P" SODFL4025X160N 211.328,154.178 r90 top
Y1 "3225-8Mhz" FP-NX3225SA-MFG 203.708,56.261 r0 top
Y2 "FC135-32.7680K" FP-FC-135-MFG 208.915,55.245 r0 top
Y3 "FC135-32.7680K" FP-FC-135-MFG 316.611,152.273 r0 top
Y4 "3225-40Mhz" FP-NX3225SA-MFG 223.266,153.289 r0 top

## Footprints (in the part's own frame and the unit in brackets; to place one, negate y for a bottom-side part, rotate by r counter-clockwise, add the part's x,y. Pads: shape width x height; smd on the part's side, far side on the other; paste and mask are expansions set on the pad)
1N5819W [mm]
  rect 1.12x0.99 smd: A(1.57,0) K(-1.57,0)
  silkscreen extent -2.85,-0.9 1.4,0.9, body extent -1.8,-0.9 1.8,0.9, height 1.1
2.4Ghz-IFA [mm] "2.4Ghz InvertFAntenna"
  rect 0.9x0.5 smd: GND(-0.45,0.377)
  rect 0.5x0.5 smd: SIG(0.95,0.377)
  Top Layer 1 region: -0.9,0 0,0 0,4.959 -0.9,4.959
  Top Layer 1 region: 8.3,2.26 8.8,2.26 8.8,4.96 8.3,4.96
  Top Layer 1 region: 6.1,5.4 6.1,4.9 8.8,4.9 8.8,5.4
  Top Layer 1 region: 3.95,2.76 3.95,2.26 6.15,2.26 6.15,2.76
  Top Layer 1 region: -0.9,4.9 4.1,4.9 4.1,5.4 -0.9,5.4
  Top Layer 1 region: 0.7,0 1.2,0 1.2,4.95 0.7,4.95
  Top Layer 1 region: 3.6,2.26 4.1,2.26 4.1,5.01 3.6,5.01
  Top Layer 1 region: 6.1,2.26 6.6,2.26 6.6,4.96 6.1,4.96
  Top Layer 1 region: 8.7,2.76 8.7,2.26 10.9,2.26 10.9,2.76
  Top Layer 1 region: 10.8,5.4 10.8,4.9 13.5,4.9 13.5,5.4
  Top Layer 1 region: 10.8,2.26 11.3,2.26 11.3,4.96 10.8,4.96
  Top Layer 1 region: 13,0.96 13.5,0.96 13.5,5 13,5
  Keep-Out Layer region: -1.332,0.579 13.716,0.579 13.716,8.072 -1.332,8.072
  Keep-Out Layer lines w0.254: 13.7,8.124 -1.4,8.124 -1.4,0.5 13.654,0.5 ; 13.8,8.1 13.754,0.5
  silkscreen extent -1.4,0 13.84,8.11
0154007.DR [mm]
  rect 4.24x3.81 smd: 1(-3.185,0) 2(3.185,0)
  silkscreen extent -4.86,-2.51 4.86,2.51, body extent -4.86,-2.51 4.86,2.51, height 3.81
648104131822 [mm] "1.50mm SMT Male Horizontal Shrouded Header, 4p"
  rect 0.7x2.6 smd: 1(-2.25,2.65) 2(-0.75,2.65) 3(0.75,2.65) 4(2.25,2.65)
  rect 1.1x1.9 smd: MP1(-4.2,-1) MP2(4.2,-1)
  silkscreen extent -4.65,-3.13 4.65,3.13, body extent -4.6,-3 4.6,3.47, height 3.74
648107131822 [mm] "1.50mm SMT Male Horizontal Shrouded Header, 7p"
  rect 0.7x2.6 smd: 1(-4.5,2.65) 2(-3,2.65) 3(-1.5,2.65) 4(0,2.65) 5(1.5,2.65) 6(3,2.65) 7(4.5,2.65)
  rect 1.1x1.9 smd: MP1(-6.45,-1) MP2(6.45,-1)
  silkscreen extent -6.9,-3.13 6.9,3.13, body extent -6.85,-3 6.85,3.47, height 3.74
CAP_0805 [mm]
  rect 0.9x1.3 smd: 1(-0.975,-0.025) 2(0.925,-0.025)
  silkscreen extent -1.63,-0.86 1.57,0.81, body extent -1.03,-0.65 0.97,0.6, height 0.6
CAPC0402(1005)60_N [mm] "Chip Capacitor, Body 1.0x0.5mm, Height 0.6mm, IPC Medium Density"
  rect 0.62x0.62 smd: 1(-0.45,0) 2(0.45,0)
  body extent -0.55,-0.3 0.55,0.3, height 0.6
CAPMP3216X180N [mm]
  rect 1.79x1.21 smd: 1(-1.31,0) 2(1.31,0)
  silkscreen extent -2.8,-0.8 0.1,0.8, body extent -1.6,-0.8 1.6,0.8, height 1.8
CAPPC3528X210N [mm]
  rect 1.34x3.02 smd: 1(-1.54,0) 2(1.54,0)
  silkscreen extent -0.55,-1.5 0.55,1.5, body extent -1.75,-1.4 1.75,1.4, height 2.1
DIOM4325X250N [mm]
  rect 2.12x1.5 smd: A(2.115,0) C(-2.115,0)
  silkscreen extent -4,-1.28 2.16,1.28, body extent -2.57,-1.28 2.57,1.28, height 2.5
DPAK [mil]
  rect 63x118 smd: 1(-89,-194) 3(87,-194)
  rect 214.63x275.59 smd: 4(0,72.94)
  silkscreen extent -130,-118 130,126, body extent -130,-198 130,198, height 94
FER_0603 [mm]
  rect 0.8x0.8 smd: 1(-0.801,0.076) 2(0.699,0.076)
  silkscreen extent -1.4,-0.51 1.3,0.66, body extent -0.85,-0.32 0.75,0.48, height 0.8
FP-BLM18-0_15-t0_8-MFG [mm]
  rect 0.65x0.7 smd paste+0 mask+0: 1(-0.675,0) 2(0.675,0)
  silkscreen extent -0.87,-0.72 0.87,0.72, body extent -1.1,-0.58 1.1,0.58, height 0.25
FP-FC-135-MFG [mm]
  rect 1x1.8 smd paste+0 mask+0: 1(-1.25,0) 2(1.25,0)
  silkscreen extent -0.38,-0.8 0.38,0.8, body extent -1.85,-1 1.85,1, height 0.25
FP-NX3225SA-MFG [mm]
  rect 1.4x1.2 smd paste+0 mask+0: 1(-1.1,-0.8) 2(1.1,-0.8) 3(1.1,0.8) 4(-1.1,0.8)
  silkscreen extent -1.22,-2.02 0.03,1.3, body extent -1.9,-1.5 1.9,1.5, height 0.25
FP-WSLP2512R0100FEA-IPC_A [mm]
  rect 1.824x3.539 smd paste+0 mask+0: 1(-2.943,0) 2(2.943,0)
  silkscreen extent -1.73,-1.77 1.73,1.77, body extent -4.35,-2.27 4.35,2.27, height 0.25
Fuse_SMD_0805 [mil] "Fuse SMD, size 0805"
  rect 30x70 smd: 0(-42,0) 1(41,0)
  silkscreen extent -62,-40 62,41, body extent -43,-31 43,29, height 20
HB9500-2 [mm] "High Power Terminal , 25A , 300V"
  rect 4x2 hole 0.8 square: 1(0,0) 2(9.5,0)
  silkscreen extent -5.59,-5.21 15.11,10.92, body extent -5.5,-5.12 15,10.87, height 18.2
HB9500-3 [mm]
  rect 4x2 hole 0.8 square: 1(0,0) 2(9.5,0) 3(19,0)
  silkscreen extent -5.59,-5.21 24.51,10.92, body extent -5.5,-5.12 24.5,10.87, height 23.2
INDC1608X80N [mm]
  rect 0.94x1.02 smd: 1(-0.79,0) 2(0.79,0)
  body extent -0.8,-0.38 0.8,0.42, height 0.83
IPEX_20279-001E-03 [mm]
  rect 1x1.05 smd: 1(0,-1.525)
  rect 1.05x2.2 smd: 2(1.475,0) 3(-1.475,0)
  Keep-Out Layer region: 0.95,-1 -0.95,-1 -0.95,1.1 0.95,1.1
  silkscreen extent -0.7,-2.71 0.7,1.55, body extent -1.5,-1.55 1.5,1.55, height 1.25
IR2104SPBF [mm]
  rect 1.78x0.72 smd paste-2: 1(-2.34,1.905) 2(-2.34,0.635) 3(-2.34,-0.635) 4(-2.34,-1.905) 5(2.34,-1.905) 6(2.34,-0.635) 7(2.34,0.635) 8(2.34,1.905)
  silkscreen extent -2.55,-2.45 1.15,2.9, body extent -3,-2.5 3,2.5, height 1.75
MOLEX_2171790001 [mm]
  rect 0.59x1.15 smd mask+0.064: A1B12(-3.2,3.425) A4B9(-2.4,3.425) B1A12(3.2,3.425) B4A9(2.4,3.425)
  rect 0.298x1.15 smd mask+0.064: A5(-1.25,3.425) A6(-0.25,3.425) A7(0.25,3.425) A8(1.25,3.425) B5(1.75,3.425) B6(0.75,3.425) B7(-0.75,3.425) B8(-1.75,3.425)
  oval 1x2.2 hole 0.6 slot 1.8 at 90 deg mask+0.064: SH1(-4.32,-1.15) SH2(4.32,-1.15)
  oval 1x1.8 hole 0.6 slot 1.4 at 90 deg mask+0.064: SH3(-4.32,2.85) SH4(4.32,2.85)
  silkscreen extent -4.62,-3.4 4.62,1.63, body extent -4.47,-3.25 4.47,3.5, height 3.24
QFN50P500X500X90-33N [mm]
  rrect25% 0.81x0.27 smd mask+0: 1(-2.445,1.75) 2(-2.445,1.25) 3(-2.445,0.75) 4(-2.445,0.25) 5(-2.445,-0.25) 6(-2.445,-0.75) 7(-2.445,-1.25) 8(-2.445,-1.75) 17(2.445,-1.75) 18(2.445,-1.25) 19(2.445,-0.75) 20(2.445,-0.25) 21(2.445,0.25) 22(2.445,0.75) 23(2.445,1.25) 24(2.445,1.75)
  rrect25% 0.27x0.81 smd mask+0: 9(-1.75,-2.445) 10(-1.25,-2.445) 11(-0.75,-2.445) 12(-0.25,-2.445) 13(0.25,-2.445) 14(0.75,-2.445) 15(1.25,-2.445) 16(1.75,-2.445) 25(1.75,2.445) 26(1.25,2.445) 27(0.75,2.445) 28(0.25,2.445) 29(-0.25,2.445) 30(-0.75,2.445) 31(-1.25,2.445) 32(-1.75,2.445)
  rect 3.7x3.7 smd paste-0.68 mask+0.05: 33(0,0)
  silkscreen extent -3.5,-2.5 2.5,2.5, body extent -2.5,-2.5 2.5,2.5, height 0.9
QFN50P700X700X60-49N [mm]
  rect 0.86x0.27 smd mask+0.05: 1(-3.435,2.75) 2(-3.435,2.25) 3(-3.435,1.75) 4(-3.435,1.25) 5(-3.435,0.75) 6(-3.435,0.25) 7(-3.435,-0.25) 8(-3.435,-0.75) 9(-3.435,-1.25) 10(-3.435,-1.75) 11(-3.435,-2.25) 12(-3.435,-2.75) 25(3.435,-2.75) 26(3.435,-2.25) 27(3.435,-1.75) 28(3.435,-1.25) 29(3.435,-0.75) 30(3.435,-0.25) 31(3.435,0.25) 32(3.435,0.75) 33(3.435,1.25) 34(3.435,1.75) 35(3.435,2.25) 36(3.435,2.75)
  rect 0.27x0.86 smd mask+0.05: 13(-2.75,-3.435) 14(-2.25,-3.435) 15(-1.75,-3.435) 16(-1.25,-3.435) 17(-0.75,-3.435) 18(-0.25,-3.435) 19(0.25,-3.435) 20(0.75,-3.435) 21(1.25,-3.435) 22(1.75,-3.435) 23(2.25,-3.435) 24(2.75,-3.435) 37(2.75,3.435) 38(2.25,3.435) 39(1.75,3.435) 40(1.25,3.435) 41(0.75,3.435) 42(0.25,3.435) 43(-0.25,3.435) 44(-0.75,3.435) 45(-1.25,3.435) 46(-1.75,3.435) 47(-2.25,3.435) 48(-2.75,3.435)
  rect 5.6x5.6 smd paste-4 mask+0.05: 49(0,0)
  silkscreen extent -4.6,-3.5 3.5,3.5, body extent -3.5,-3.5 3.5,3.5, height 0.65
R-0402-1K [mm]
  rect 0.475x0.5 smd: 1(-0.512,0) 2(0.512,0)
  silkscreen extent -0.89,-0.38 0.89,0.38, body extent -0.5,-0.25 0.5,0.25, height 0.35
R-0402-10K [mm]
  rect 0.475x0.5 smd: 1(-0.512,0.004) 2(0.512,0.004)
  silkscreen extent -0.89,-0.38 0.89,0.39, body extent -0.5,-0.25 0.5,0.25, height 0.35
RESISTOR_0805 [mm] "Chip Resistor, 2-Leads, Body 2,00x1,20mm, IPC Medium Density"
  rect 1.1x1.3 smd: 1(-0.85,0) 2(0.85,0)
  silkscreen extent -1.65,-0.9 1.65,0.9, body extent -1,-0.65 1,0.65, height 0.45
SOD-80_MiniMELF_Glass [mm]
  rrect25% 1.2x1.7 smd: A(1.7,0) K(-1.7,0)
  silkscreen extent -2.65,-1.2 2,1.2, body extent -1.85,-0.8 1.85,0.8, height 1.63
SODFL3816X120N [mm]
  rect 0.97x0.73 smd: A(1.72,0) C(-1.72,0)
  silkscreen extent -3.3,-0.8 1.35,0.8, body extent -1.9,-0.8 1.9,0.8, height 1.1
SODFL4025X160N [mm]
  rrect45% 1.11x1.51 smd paste-2 mask+0: 1(-1.7,0) 2(1.7,0)
  silkscreen extent -2.85,-1.25 1.5,1.25, body extent -2,-1.25 2,1.25, height 1.6
SOIC127P790X216-8N [mm]
  rrect25% 1.61x0.58 smd: 1(-3.605,1.905) 2(-3.605,0.635) 3(-3.605,-0.635) 4(-3.605,-1.905) 5(3.605,-1.905) 6(3.605,-0.635) 7(3.605,0.635) 8(3.605,1.905)
  silkscreen extent -5.31,-2.64 2.64,2.64, body extent -3.95,-2.64 3.95,2.64, height 2.16
SOP65P640X120-8N [mm]
  rrect25% 1.57x0.41 smd: 1(-2.87,0.975) 2(-2.87,0.325) 3(-2.87,-0.325) 4(-2.87,-0.975) 5(2.87,-0.975) 6(2.87,-0.325) 7(2.87,0.325) 8(2.87,0.975)
  silkscreen extent -4.54,-1.5 2.2,1.5, body extent -3.2,-1.5 3.2,1.5, height 1.2
SOT65P210X110-6N [mm]
  rrect50% 1.06x0.39 smd: 1(-0.935,0.65) 2(-0.935,0) 3(-0.935,-0.65) 4(0.935,-0.65) 5(0.935,0) 6(0.935,0.65)
  silkscreen extent -0.68,-1.1 0.68,1.1, body extent -1.05,-1 1.05,1, height 1.1
SOT94P279X129-5N [mm]
  rrect25% 1.22x0.65 smd: 1(-1.245,0.94) 2(-1.245,0) 3(-1.245,-0.94) 4(1.245,-0.94) 5(1.245,0.94)
  silkscreen extent -2.5,-1.58 0.9,1.58, body extent -1.4,-1.45 1.4,1.45, height 1.3
SOT95P280X125-3N [mm]
  rrect25% 1.21x0.59 smd: 1(-1.255,0.95) 2(-1.255,-0.95) 3(1.255,0)
  silkscreen extent -2.6,-1.56 0.9,1.56, body extent -1.4,-1.45 1.4,1.45, height 1.25
SOT95P280X145-5N [mm]
  rrect50% 1.22x0.6 smd: 1(-1.245,0.95) 2(-1.245,0) 3(-1.245,-0.95) 4(1.245,-0.95) 5(1.245,0.95)
  silkscreen extent -2.6,-1.57 0.88,1.57, body extent -1.35,-1.45 1.35,1.45, height 1.45
SSD1306_China-Footprint-1 [mm]
  rrect50% 0.25x1.5 smd: 1(0,0) 2(0.707,0) 3(1.414,0) 4(2.121,0) 5(2.828,0) 6(3.535,0) 7(4.242,0) 8(4.949,0) 9(5.656,0) 10(6.363,0) 11(7.07,0) 12(7.777,0) 13(8.484,0) 14(9.191,0) 15(9.898,0) 16(10.605,0) 17(11.312,0) 18(12.019,0) 19(12.726,0) 20(13.433,0) 21(14.14,0) 22(14.847,0) 23(15.554,0) 24(16.261,0) 25(16.968,0) 26(17.675,0) 27(18.382,0) 28(19.089,0) 29(19.796,0) 30(20.503,0)
  body extent -2.5,-6.12 23.2,15.68, height 1.75
TO229P990X239-3_4N [mm]
  rrect25% 2.83x0.97 smd: 1(-4.14,2.29) 3(-4.14,-2.29)
  rect 6.1x5.63 smd paste-4: 4(2.51,0)
  silkscreen extent -6.65,-3.27 3.87,3.27, body extent -4.95,-3.27 4.95,3.27, height 2.39
TO-263 [mm] "D2PAK"
  rect 3.5x1.6 smd: 1(-6.7,2.54) 2(-6.7,-2.54)
  rect 9.75x12.2 smd paste-7: 3(3.575,0)
  silkscreen extent -6.48,-5 -2.51,5, body extent -7.71,-5.1 7.71,5.1, height 4.6
WCAP-ASLI_D4H5.5 [mm] "Aluminium Electrolytic V-Chip SMT Capacitors, 4x5.5mm"
  rect 2.6x1.6 smd: 1(1.8,0) 2(-1.8,0)
  silkscreen extent -2.25,-2.25 2.25,2.25, body extent -2.5,-2.15 2.5,2.15, height 5.5
WL-SMCW_0603_H=0.7mm [mm] "SMD Mono-color Chip LED, body 1.6x0.8mm"
  rect 0.8x0.8 smd: 1(-0.8,0) 2(0.8,0)
  silkscreen extent -1.4,-0.58 1.4,0.58, body extent -0.8,-0.4 0.8,0.4, height 0.7